# EAGLE board SchemaDMP (EAGLE 9.5.1)
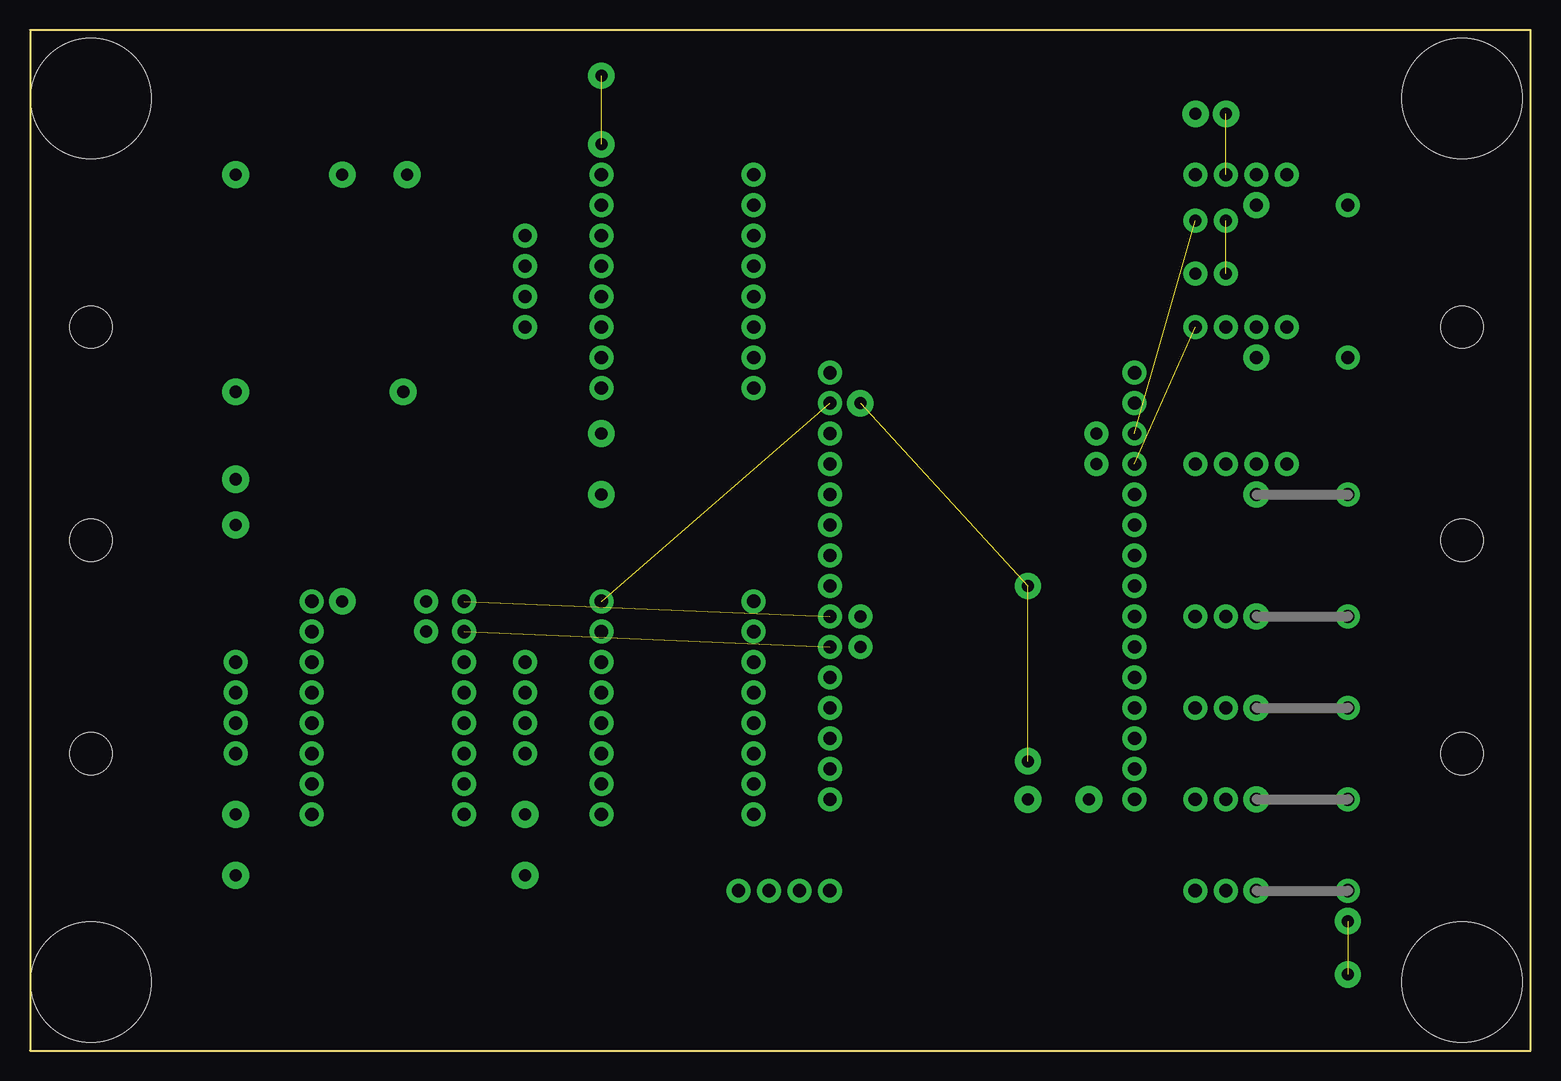
[diagram p0: board, top side]
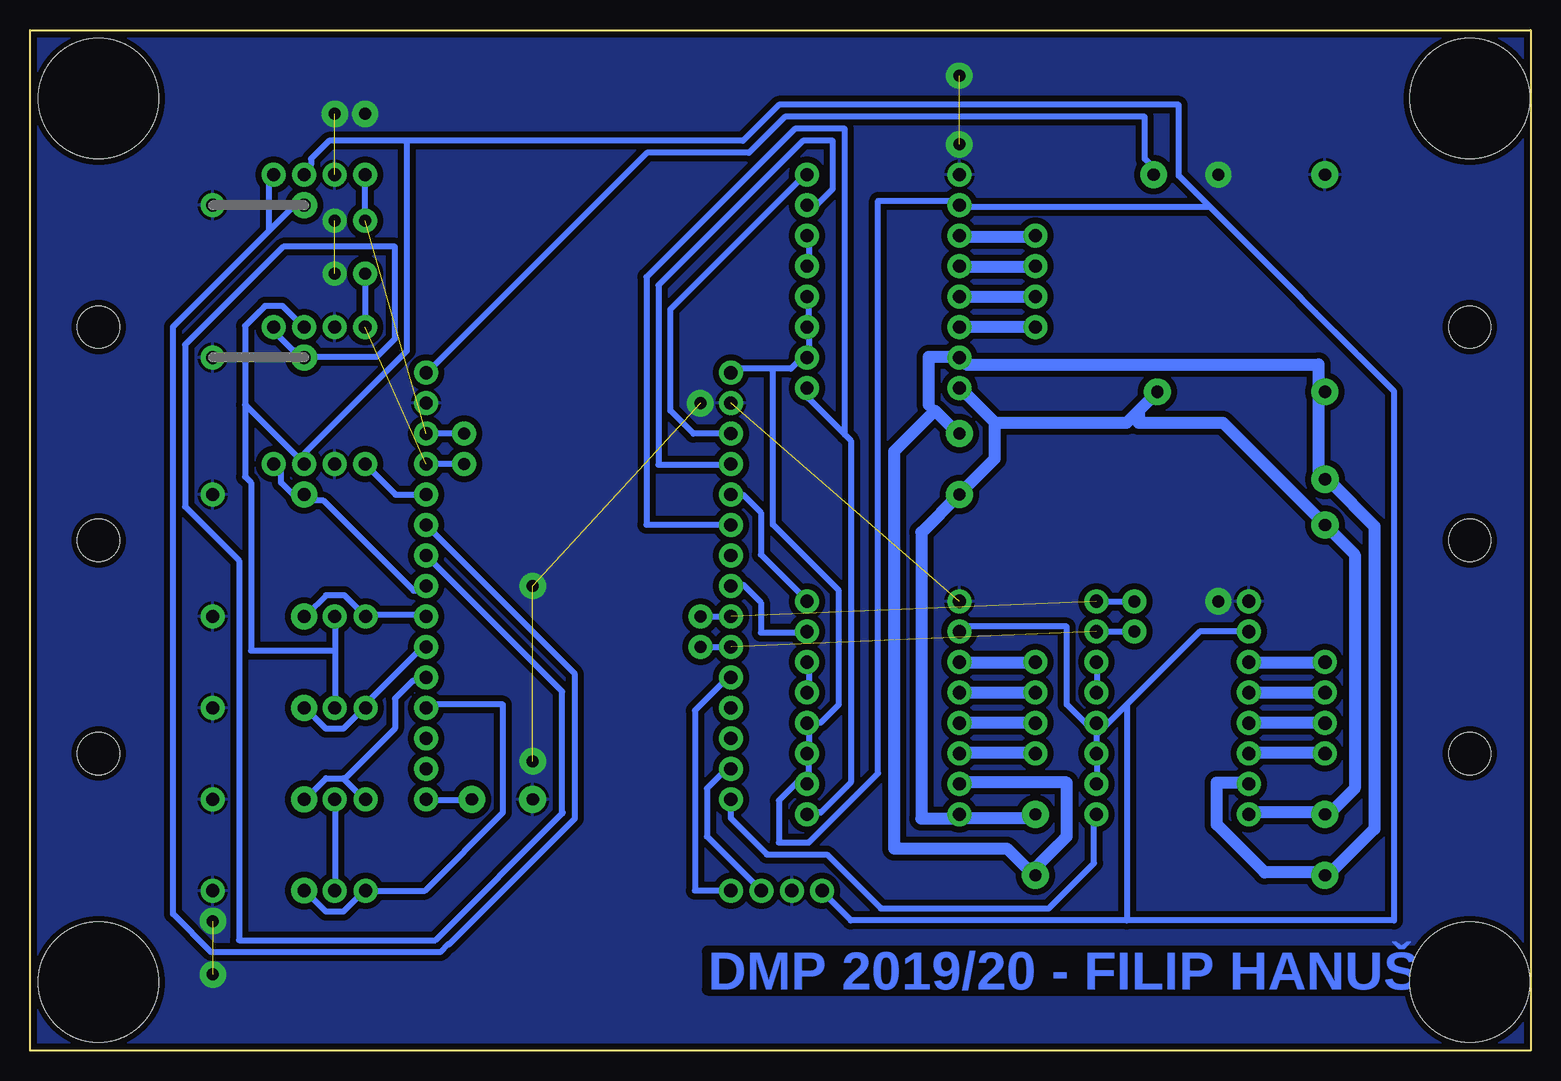
[diagram p1: board, bottom side, seen from below]

Size 125.09 x 85.09 mm. Coordinates in mm from the lower left corner, seen from the top.
Outline: 0,0 125.09,0 125.09,85.09 0,85.09 0,0
Copper layers (1*16): Top 0.035mm / dielectric 1.5mm / Bottom 0.035mm
Design rules "default *": minimum track width 0.5mm, minimum drill 1mm, track to track 0.5mm, track to pad 0.5mm, pad to pad 0.3mm, via to via 0.5mm, smd to smd 0.3mm, copper to edge 0.5mm, drill to drill 0.5mm, minimum pad ring 10mil, minimum via ring 8mil, stop-mask expansion 4mil, vias tented up to drill 0mil, thermal gap 10mil
Holes 3.5 mm at 5.08,42.55 119.38,42.55 5.08,60.33 5.08,24.77 119.38,60.33 119.38,24.77
Holes 10 mm at 5.08,79.38 119.38,79.38 119.38,5.71 5.08,5.71

## Footprints (pad centres in the part's own frame; a part is rotated, then mirrored left to right if it is on the bottom)
R = drill 1.1 pad 2.15: 1 0,0 | drill 1.1 pad 2: 2 7.62,0
A4988 = drill 1.1 pad 2: P$1 0,0; P$2 2.54,0; P$3 5.08,0; P$4 7.62,0; P$5 10.16,0; P$6 12.7,0; P$7 15.24,0; P$8 17.78,0; P$9 0,-12.7; P$10 2.54,-12.7; P$11 5.08,-12.7; P$12 7.62,-12.7; P$13 10.16,-12.7; P$14 12.7,-12.7; P$15 15.24,-12.7; P$16 17.78,-12.7
JST_4P = drill 1.1 pad 2: P$1 0,0; P$2 0,-2.54; P$3 0,-5.08; P$4 0,-7.62
POWER_2P = drill 1.02 pad 2.27: P$1 0,1.27; P$2 0,-2.54
ESP32 = drill 1.1 pad 2: P$1 0,0; P$2 2.54,0; P$3 5.08,0; P$4 7.62,0; P$5 10.16,0; P$6 12.7,0; P$7 15.24,0; P$8 17.78,0; P$9 20.32,0; P$10 22.86,0; P$11 25.4,0; P$12 27.94,0; P$13 30.48,0; P$14 33.02,0; P$15 35.56,0; P$16 0,-25.4; P$17 2.54,-25.4; P$18 5.08,-25.4; P$19 7.62,-25.4; P$20 10.16,-25.4; P$21 12.7,-25.4; P$22 15.24,-25.4; P$23 17.78,-25.4; P$24 20.32,-25.4; P$25 22.86,-25.4; P$26 25.4,-25.4; P$27 27.94,-25.4; P$28 30.48,-25.4; P$29 33.02,-25.4; P$30 35.56,-25.4
JST_2P = drill 1.1 pad 2: P$1 0,0; P$2 0,-2.57
JST_MOTOR = drill 1.1 pad 2: P$1 0,0; P$2 0,-2.54; P$3 0,-5.08; P$4 0,-7.62
JST_VL053L = drill 1.1 pad 2: P$1 0,0; P$2 0,-2.54; P$3 0,-5.08; P$4 0,-7.62
C = drill 1.02 pad 2.24: P$1 0,0; P$2 5.08,0
STEPDOWN = drill 1.02 pad 2.24: P$1 0,0; P$2 0,14.287; P$3 18.098,13.97; P$4 18.098,0

## Placement (x,y rotation side)
R1  RR  [R]  102.23,36.2 0 top
R2  RR  [R]  102.23,28.57 0 top
R3  RR  [R]  102.23,20.95 0 top
R4  RR  [R]  102.23,13.34 0 top
R5  RR  [R]  102.23,70.48 180 bottom
R6  RR  [R]  102.23,57.78 180 bottom
R7  RR  [R]  102.23,46.35 0 top
U$1  A4988  [A4988]  47.62,19.68 90 top
U$2  A4988  [A4988]  23.5,19.68 90 top
U$3  JST_4P  [JST_4P]  97.16,48.9 90 top
U$4  JST_4P  [JST_4P]  97.16,73.03 90 top
U$5  A4988  [A4988]  47.62,55.24 90 top
U$6  JST_4P  [JST_4P]  97.16,60.33 90 top
U$7  POWER_2P  [POWER_2P]  17.14,45.09 180 top
U$8  ESP32  [ESP32]  92.08,56.52 270 top
U$9  JST_2P  [JST_2P]  99.69,20.95 270 top
U$10  JST_2P  [JST_2P]  99.69,28.57 270 top
U$11  JST_2P  [JST_2P]  99.69,13.34 270 top
U$12  JST_MOTOR  [JST_MOTOR]  41.27,60.33 180 top
U$13  JST_MOTOR  [JST_MOTOR]  41.27,24.77 180 top
U$14  JST_VL053L  [JST_VL053L]  59.05,13.34 90 top
U$15  JST_2P  [JST_2P]  99.69,36.2 270 top
U$16  JST_MOTOR  [JST_MOTOR]  17.14,24.77 180 top
U$18  C  [C]  17.14,14.61 90 top
U$19  C  [C]  41.27,14.61 90 top
U$20  C  [C]  47.62,51.44 270 top
U$22  STEPDOWN  [STEPDOWN]  17.14,73.03 270 top
U$23  C  [C]  83.19,20.95 0 top

## Library data of the parts
R1-R7 U$1-U$16 U$18-U$20 U$22 U$23 = _DMP

## Nets
GND: R1.2 R2.2 R3.2 R4.2 R5.2 R6.2 R7.2 U$1.P$8 U$2.P$8 U$3.P$2 U$4.P$2 U$5.P$8 U$6.P$2 U$8.P$2 U$8.P$17 U$14.P$2 U$22.P$1 U$23.P$1
N$2: U$1.P$2 U$2.P$2 U$5.P$2 U$7.P$2 U$18.P$1 U$19.P$1 U$20.P$1 U$22.P$4
N$3: U$5.P$3 U$12.P$1
N$4: U$5.P$4 U$12.P$2
N$5: U$5.P$5 U$12.P$3
N$6: U$5.P$6 U$12.P$4
N$7: U$1.P$3 U$13.P$1
N$8: U$1.P$4 U$13.P$2
N$9: U$1.P$5 U$13.P$3
N$10: U$1.P$6 U$13.P$4
N$11: U$2.P$3 U$16.P$1
N$12: U$2.P$4 U$16.P$2
N$13: U$2.P$5 U$16.P$3
N$14: U$2.P$6 U$16.P$4
N$15: U$5.P$16 U$8.P$18
N$17: U$1.P$9 U$5.P$9 U$8.P$21
N$19: U$1.P$7 U$1.P$10 U$1.P$11 U$1.P$12 U$2.P$7 U$2.P$10 U$2.P$11 U$2.P$12 U$3.P$3 U$4.P$3 U$5.P$7 U$5.P$10 U$5.P$11 U$5.P$12 U$6.P$3 U$8.P$16 U$10.P$1 U$14.P$1 U$15.P$1
N$21: U$5.P$13 U$5.P$14
N$22: U$1.P$13 U$1.P$14
N$23: U$2.P$13 U$2.P$14
N$24: R5.1 U$4.P$4 U$8.P$6
N$25: U$5.P$15 U$8.P$19
N$26: U$1.P$16 U$8.P$20
N$27: U$1.P$15 U$8.P$23
N$28: U$2.P$15 U$8.P$25
N$29: U$2.P$16 U$8.P$24
N$30: U$8.P$1 U$22.P$2
N$31: R2.1 U$8.P$10 U$10.P$2
N$32: R3.1 U$8.P$11 U$9.P$2
N$33: R4.1 U$8.P$12 U$11.P$2
N$34: U$8.P$26 U$14.P$4
N$35: U$8.P$29 U$14.P$3
N$36: U$4.P$1 U$8.P$3
N$37: U$6.P$1 U$8.P$4
N$38: U$3.P$1 U$8.P$5
N$39: R6.1 U$6.P$4 U$8.P$7
N$40: R7.1 U$3.P$4 U$8.P$8
N$41: U$2.P$9 U$8.P$30
N$44: U$8.P$15 U$23.P$2
N$45: R1.1 U$8.P$9 U$15.P$2
N$49: U$9.P$1 U$11.P$1
N$51: U$1.P$1 U$2.P$1 U$5.P$1 U$7.P$1 U$18.P$2 U$19.P$2 U$20.P$2 U$22.P$3

## Tracks (layer width: path | path; a pad name or v marks a point on that pad's centre or on a via)
GND  (via drill 1 pad 2, 1 pad 2.2)  (7 unrouted)
  other vias: 47.62,75.56 47.62,81.28 69.22,53.98 99.69,78.11 109.86,6.35 83.19,24.13 83.19,38.73 99.69,69.22 99.69,64.77 97.16,78.11 109.86,10.79 26.04,37.47 26.04,73.03
  pour Bottom: 0,85.09 0,0 125.09,0 125.09,85.09
N$2
  Bottom 0.5: 41.16,15.35 41.16,14.85 U$19.P$1 41.66,14.85 | 47.16,22.35 U$1.P$2 | 23.66,22.35 U$2.P$2 | 17.16,14.85 U$18.P$1 16.66,14.85 | 49.66,53.35 50.16,53.85 | 47.66,57.85 U$5.P$2 | 47.66,51.35 U$20.P$1 | 17.66,48.35 17.16,47.85 U$7.P$2 16.66,47.35 | 17.66,54.35 17.16,54.85 U$22.P$4 17.66,54.35
  Bottom 1: 47.16,22.35 38.66,22.35 38.66,17.85 41.16,15.35 | 23.66,22.35 26.16,22.35 26.16,18.85 22.16,14.85 17.16,14.85 | 47.66,57.85 50.16,57.85 50.16,53.85 | 47.66,51.35 49.66,53.35 53.06,49.95 53.06,16.85 43.66,16.85 41.66,14.85 | 17.66,48.35 17.66,54.35 17.66,57.22 47.05,57.22 U$5.P$2 | 16.66,14.85 13.03,18.48 13.03,43.72 16.66,47.35
N$3
  Bottom 0.5: 41.66,60.35 U$12.P$1 | 47.16,60.35 U$5.P$3
  Bottom 1: 47.16,60.35 41.66,60.35
N$4
  Bottom 0.5: 41.66,62.85 U$12.P$2 | 47.16,62.85 U$5.P$4
  Bottom 1: 47.16,62.85 41.66,62.85
N$5
  Bottom 0.5: 41.66,65.35 U$12.P$3 | 47.16,65.35 U$5.P$5
  Bottom 1: 47.16,65.35 41.66,65.35
N$6
  Bottom 0.5: 41.66,67.85 U$12.P$4 | 47.16,67.85 U$5.P$6
  Bottom 1: 47.16,67.85 41.66,67.85
N$7
  Bottom 0.5: 41.66,24.85 U$13.P$1 | 47.16,24.85 U$1.P$3
  Bottom 1: 47.16,24.85 41.66,24.85
N$8
  Bottom 0.5: 41.66,27.35 U$13.P$2 | 47.16,27.35 U$1.P$4
  Bottom 1: 47.16,27.35 41.66,27.35
N$9
  Bottom 0.5: 41.66,29.85 U$13.P$3 | 47.16,29.85 U$1.P$5
  Bottom 1: 47.16,29.85 41.66,29.85
N$10
  Bottom 0.5: 41.66,32.35 U$13.P$4 | 47.16,32.35 U$1.P$6
  Bottom 1: 47.16,32.35 41.66,32.35
N$11
  Bottom 0.5: 17.16,24.85 U$16.P$1 | 23.16,24.85 U$2.P$3
  Bottom 1: 23.16,24.85 17.16,24.85
N$12
  Bottom 0.5: 17.16,27.35 U$16.P$2 | 23.16,27.35 U$2.P$4
  Bottom 1: 23.16,27.35 17.16,27.35
N$13
  Bottom 0.5: 17.16,29.85 U$16.P$3 | 23.16,29.85 U$2.P$5
  Bottom 1: 23.16,29.85 17.16,29.85
N$14
  Bottom 0.5: 17.16,32.35 U$16.P$4 | 23.16,32.35 U$2.P$6
  Bottom 1: 23.16,32.35 17.16,32.35
N$15
  Bottom 0.5: U$5.P$16 60.66,72.85 71.7,61.81 71.7,53.35 69.78,51.44 U$8.P$18
N$17
  Bottom 0.5: 57.16,51.35 60.16,54.35 60.16,54.85 U$5.P$9 | 57.16,51.35 56.66,50.85 56.66,22.35 59.16,19.85 60.16,19.85 U$1.P$9 | 57.16,51.35 57.16,76.85 61.34,76.85 73.7,64.49 73.7,43.85 67.16,43.85 U$8.P$21
N$19
  Bottom 0.5: U$2.P$10 36.16,22.35 36.16,24.35 U$2.P$11 36.16,24.85 36.16,26.35 | 36.16,26.35 36.16,26.85 U$2.P$12 | 36.16,26.35 33.66,28.85 | 23.66,34.85 U$2.P$7 27.59,34.92 33.66,28.85 | 36.16,26.35 U$2.P$12 | U$1.P$7 47.16,35.35 38.66,35.35 38.66,28.85 36.66,26.85 U$2.P$12 | 33.66,10.85 56.66,10.85 58.66,12.85 U$14.P$1 | 33.66,28.85 33.66,10.85 | 99.66,33.35 99.66,35.85 U$15.P$1 | 99.66,33.35 99.66,28.85 U$10.P$1 | 107.16,53.85 102.66,49.35 U$3.P$3 102.16,49.35 102.16,49.85 93.66,58.35 93.66,75.85 | 102.66,60.35 U$6.P$3 102.3,60.33 104.05,62.08 105.5,62.08 107.16,60.41 107.16,53.85 | 93.66,75.85 100.16,75.85 101.66,74.35 101.66,73.85 102.16,73.35 U$4.P$3 | 99.66,33.35 106.66,33.35 106.66,47.35 107.16,47.85 107.16,53.85 | 63.16,56.85 61.66,56.85 60.66,57.85 U$5.P$10 60.16,57.85 60.16,59.85 U$5.P$11 60.16,60.35 60.16,62.85 U$5.P$12 | 63.16,56.85 66.66,56.85 U$8.P$16 | 60.16,22.85 60.66,22.85 62.66,20.85 62.66,17.35 60.16,17.35 54.39,23.12 54.39,70.85 47.66,70.85 U$5.P$7 47.16,70.35 26.85,70.35 26.8,70.4 | 60.16,22.85 60.16,22.35 U$1.P$10 60.16,22.85 | 60.16,22.85 60.16,24.35 U$1.P$11 60.16,24.85 60.16,26.85 U$1.P$12 60.16,27.35 59.16,27.35 57.66,28.85 57.66,38.35 63.16,43.85 63.16,56.85 | 93.66,75.85 65.66,75.85 62.66,78.85 29.34,78.85 29.34,72.94 26.8,70.4 | 33.66,10.85 11.39,10.85 11.39,54.98 26.8,70.4
N$21
  Bottom 0.5: U$5.P$13 60.16,65.85 60.16,67.85 U$5.P$14
N$22
  Bottom 0.5: U$1.P$13 60.16,29.85 60.16,32.35 U$1.P$14
N$23
  Bottom 0.5: U$2.P$13 36.16,29.85 36.16,32.35 U$2.P$14
N$24
  Bottom 0.5: 90.16,8.85 90.14,8.87 | 90.14,8.87 79.66,19.35 79.66,31.4 U$8.P$6 91.66,43.85 | 105.16,68.35 102.66,70.85 R5.1 | 105.16,68.35 113.16,60.35 113.16,11.4 109.98,8.21 90.88,8.21 90.23,8.87 90.14,8.87 | 105.16,68.35 105.16,72.85 U$4.P$4
N$25
  Bottom 0.5: U$8.P$19 67.16,48.85 72.7,48.85 72.7,63.81 60.66,75.85 58.16,75.85 58.16,71.85 59.66,70.35 60.16,70.35 U$5.P$15
N$26
  Bottom 0.5: U$1.P$16 60.66,37.85 64.16,41.35 64.16,44.85 65.66,46.35 66.66,46.35 U$8.P$20
N$27
  Bottom 0.5: U$1.P$15 60.66,34.85 64.16,34.85 64.16,37.35 65.66,38.85 66.66,38.85 U$8.P$23
N$28  (via drill 1 pad 2)  (1 unrouted)
  Bottom 0.5: v69.22,33.66 U$8.P$25 | U$2.P$15 v33.02,34.92
N$29  (via drill 1 pad 2)  (1 unrouted)
  Bottom 0.5: v69.22,36.2 U$8.P$24 | U$2.P$16 v33.02,37.47
N$30
  Bottom 0.5: U$8.P$1 91.66,56.85 73.66,74.85 65.16,74.85 62.16,77.85 32.16,77.85 32.16,74.35 31.66,73.85 31.66,73.35 U$22.P$2
N$31
  Bottom 0.5: U$10.P$2 97.12,28.89 92.16,33.85 U$8.P$10 | 102.16,28.35 R2.1 102.17,28.57 100.42,26.82 98.97,26.82 97.22,28.57 U$10.P$2 | 97.16,28.35 U$10.P$2
N$32
  Bottom 0.5: 97.16,21.35 U$9.P$2 97.22,20.95 98.97,22.7 | 102.16,21.35 R3.1 102.17,20.95 100.42,22.7 98.97,22.7 | U$8.P$11 92.16,30.85 93.16,30.85 94.66,29.35 94.66,26.85 98.81,22.7 98.97,22.7
N$33
  Bottom 0.5: 97.16,12.85 U$11.P$2 | 102.16,12.85 R4.1 102.17,13.34 100.42,11.59 98.97,11.59 97.22,13.34 U$11.P$2 | U$8.P$12 91.66,28.85 85.66,28.85 85.66,19.85 92.17,13.34 U$11.P$2
N$34
  Bottom 0.5: U$14.P$4 67.16,13.35 69.66,13.35 69.66,28.35 67.16,30.85 U$8.P$26
N$35
  Bottom 0.5: U$14.P$3 64.16,13.35 68.66,17.85 68.66,21.85 67.16,23.35 U$8.P$29
N$36  (via drill 1 pad 2)  (1 unrouted)
  Bottom 0.5: v88.9,51.44 U$8.P$3 | v97.16,69.22 U$4.P$1
N$37  (via drill 1 pad 2)  (1 unrouted)
  Bottom 0.5: v88.9,48.9 U$8.P$4 | v97.16,64.77 U$6.P$1
N$38
  Bottom 0.5: U$3.P$1 94.62,46.36 94.62,46.35 92.16,46.35 U$8.P$5
N$39
  Bottom 0.5: 80.73,19.77 91.3,9.21 107.66,9.21 107.66,40.85 112.16,45.35 112.16,58.85 103.98,67.03 94.66,67.03 94.66,59.35 96.16,57.85 102.16,57.85 R6.1 102.66,57.85 102.66,58.35 103.16,58.35 104.66,59.85 U$6.P$4 | 80.73,19.77 80.66,19.85 | 91.66,41.35 U$8.P$7 80.73,29.93 80.73,19.77
N$40
  Bottom 0.5: 101.66,45.85 102.16,46.35 R7.1 101.66,45.85 | U$8.P$8 92.16,38.35 93.12,38.35 100.62,45.85 101.66,45.85 | 101.66,45.85 102.66,45.85 104.16,47.35 104.16,48.35 104.66,48.85 U$3.P$4
N$41
  Bottom 0.5: U$2.P$9 36.39,19.55 36.39,15.62 40.16,11.85 54.16,11.85 58.66,16.35 63.66,16.35 66.67,19.36 U$8.P$30
N$44
  Bottom 0.5: U$8.P$15 91.66,20.85 88.66,20.85 U$23.P$2
N$45
  Bottom 0.5: U$8.P$9 92.16,36.35 96.66,36.35 U$15.P$2 98.88,37.95 100.42,37.95 102.02,36.35 102.16,36.35 R1.1
N$49
  Bottom 0.5: U$11.P$1 99.66,13.35 99.66,20.85 U$9.P$1
N$51
  Bottom 0.5: 47.16,19.35 U$1.P$1 47.66,19.35 | 41.66,19.35 U$19.P$2 | 23.16,19.85 U$2.P$1 | 17.16,19.85 U$18.P$2 16.66,19.85 | 47.16,54.85 U$5.P$1 | 47.16,46.85 U$20.P$2 47.66,46.35 | 31.16,54.85 U$22.P$3 | 17.16,43.85 U$7.P$1 16.66,43.35
  Bottom 1: 41.66,19.35 47.16,19.35 | 17.16,19.85 23.16,19.85 | 44.66,52.35 47.16,54.85 | 44.66,52.35 44.66,49.35 47.16,46.85 | 32.66,53.35 33.66,52.35 44.66,52.35 | 32.66,53.35 31.16,54.85 | 17.16,43.85 25.66,52.35 32.66,52.35 32.66,53.35 | 16.66,19.85 14.66,21.85 14.66,41.35 16.66,43.35 | 47.66,19.35 50.8,19.35 50.8,43.22 47.66,46.35

## Text on the board
Bottom: DMP 2019/20 - FILIP HANUŠ